# Altium PCB 12.4呼叫器.PcbDoc (part 5 of 5)
Units mm, origin at the board's own origin, x right, y up, seen from the top; angles counter-clockwise.
Board outline 60 x 92 mm, 2 copper layers (Top Layer, Bottom Layer); 66 components, 44 nets, 270 pads, 58 vias.
Unrouted connection lines stored in the file: 4.
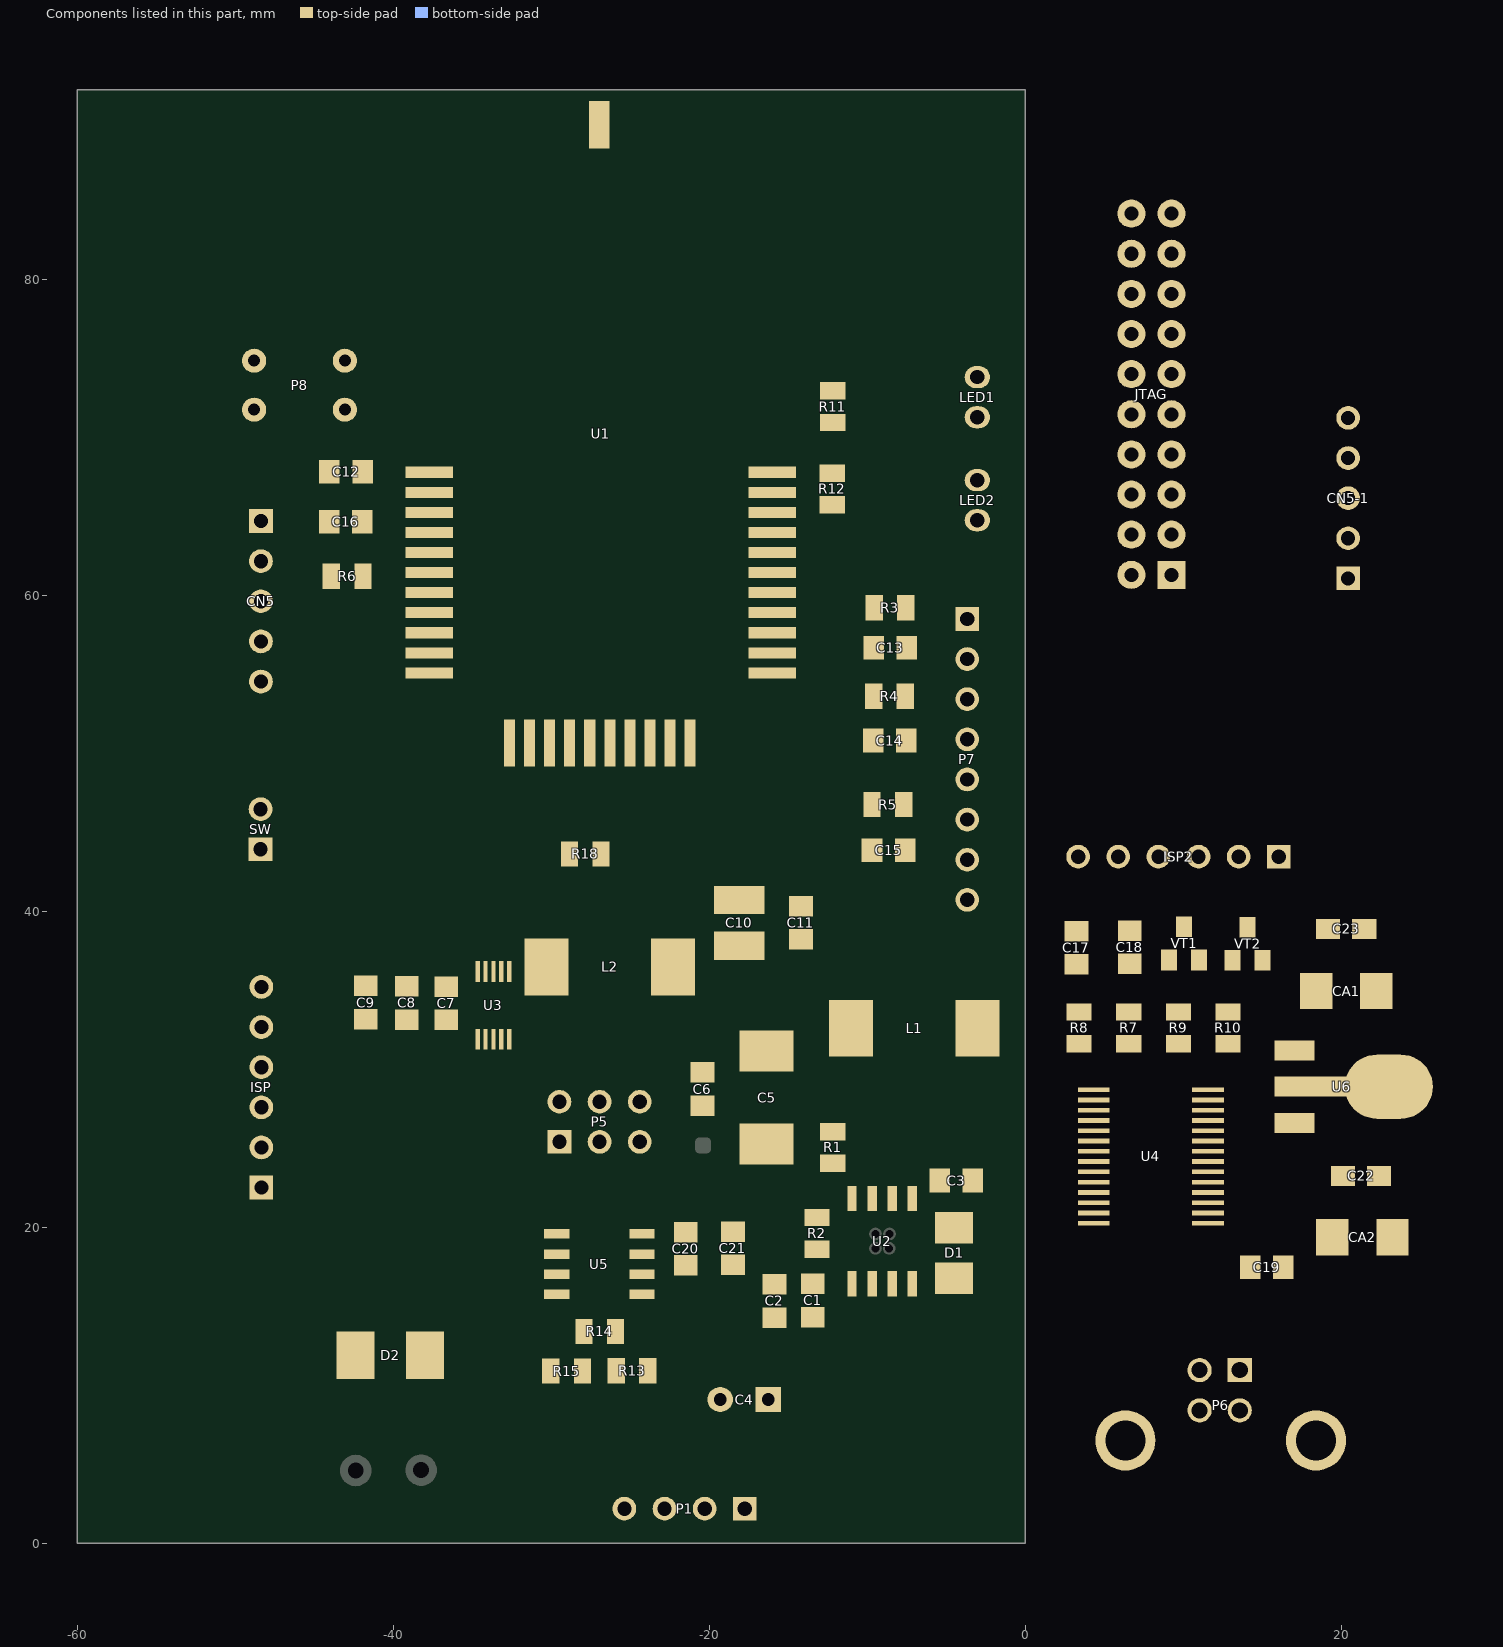
[diagram p5: the components of this part, seen from the top]

## Silkscreen, mask and mechanical layers (free items; w line width, h text height)
Top Overlay:
  circle w0.254: c-50,11 r3
  circle w0.254: c-10,11 r3
  circle w0.254: c-10,81 r3
  circle w0.254: c-50,81 r3
  circle w0.15: c-40.45,39.28 r1.422
  circle w0.15: c-38.1,30.582 r1.422
  lines w0.254: -18.73,31.21 -17.91,31.21 ; -18.31,30.82 -18.31,31.64 ; -15.84,36.41 -15.84,37.23 ; -5.8,63.53 -4.98,63.53 ; -5.69,70.4 -4.87,70.4 ; -5.38,63.14 -5.38,63.96 ; -5.27,69.98 -5.27,70.8
  text "19" at 14.757,83.795 h1.52 r90
  text "20" at 2.896,83.566 h1.52 r90
  text "GND" at -51.714,65.938 h0.5 r270
  text "VDD33" at -51.714,63.449 h0.5 r270
  text "RESET" at -51.714,60.427 h0.5 r270
  text "1" at 14.58,59.614 h1.52 r90
  text "2" at 2.921,59.055 h1.52 r90
  text "JTMS" at -51.74,57.328 h0.5 r270
  text "KEY1" at -0.127,55.905 h0.8 r90
  text "JTCK" at -51.689,54.762 h0.5 r270
  text "KEY2" at -0.127,50.47 h0.8 r90
  text "KEY3" at -0.127,45.288 h0.8 r90
  text "KEY4" at -0.152,39.751 h0.8 r90
  text "1" at 16.459,39.675 h1.5
  text "GND" at -45.06,39.497 h0.8
  text "6" at 0.864,39.472 h1.52
  text "6" at -52.349,37.516 h1.5 r270
  text "GND" at -53.035,35.992 h0.5 r270
  text "3.3V" at -17.029,35.089 h0.8
  text "Reset" at -53.035,33.528 h0.5 r270
  text "RXD" at -53.111,30.201 h0.5 r270
  text "TXD" at -53.137,27.838 h0.5 r270
  text "BOOT" at -53.162,25.654 h0.5 r270
  text "3.3V" at -53.213,23.038 h0.5 r270
  text "1" at -52.222,20.98 h1.5 r270
  text "VCC" at 15.088,10.693 h0.8
  text "D-" at 8.331,10.465 h0.8
  text "D+" at 8.382,7.925 h0.8
  text "GND" at 14.91,7.899 h0.8
  text "485_B" at -29.78,4.8 h0.8
  text "485_A" at -25.52,4.8 h0.8
  text "GND" at -20.75,4.667 h0.8
  text "+24V" at -17.85,4.667 h0.8
  text "GND" at -39.548,0.889 h1.52
  text "9V" at -44.094,0.787 h1.52
Top Solder:
  rectangle: -10.29,17.98 -7.78,20.26

## Dimensions
-54.2,9.27 to 27.878,1.31 on Mechanical 1
-54.2,15 to 0,79.928 on Mechanical 1
-45.99,92 to -47,0 on Keep-Out Layer
0,94.08 to 27.878,94.183 on Mechanical 1

## Text inside footprints (layer, text, board x,y; h text height)
CN5: Top Overlay "5" at -51.587,52.578 h0.8 r270; Top Overlay "1" at -51.384,66.853 h0.8 r270
CN5-1: Top Overlay "5" at 23.707,71.992 h0.8 r90; Top Overlay "1" at 23.673,60.63 h0.8 r90
ISP: Top Overlay "1" at -47.616,21.124 h0.8 r270; Top Overlay "6" at -47.676,36.924 h0.8 r270
ISP2: Top Overlay "1" at 17.44,44.17 h0.8; Top Overlay "6" at 1.64,44.11 h0.8
L1: Top Overlay "GS" at -7.69,32.048 h0.8
L2: Top Overlay "GS" at -27.049,35.874 h0.8
P1: Top Overlay "4" at -26.427,3.171 h0.8 r180; Top Overlay "1" at -16.292,3.12 h0.8 r180
P5: Top Overlay "6" at -22.758,28.854 h0.8; Top Overlay "3" at -22.581,23.673 h0.8; Top Overlay "1" at -31.445,23.647 h0.8; Top Overlay "4" at -31.648,28.753 h0.8